# Altium PCB PCB_V2_2020-06-20_13-22-27.pcbdoc
Units mil, origin at the board's own origin, x right, y up, seen from the top; angles counter-clockwise.
Board outline 5659.89 x 5419.88 mil, 2 copper layers (Top Layer, Bottom Layer); 30 components, 49 nets, 112 pads, 43 vias.
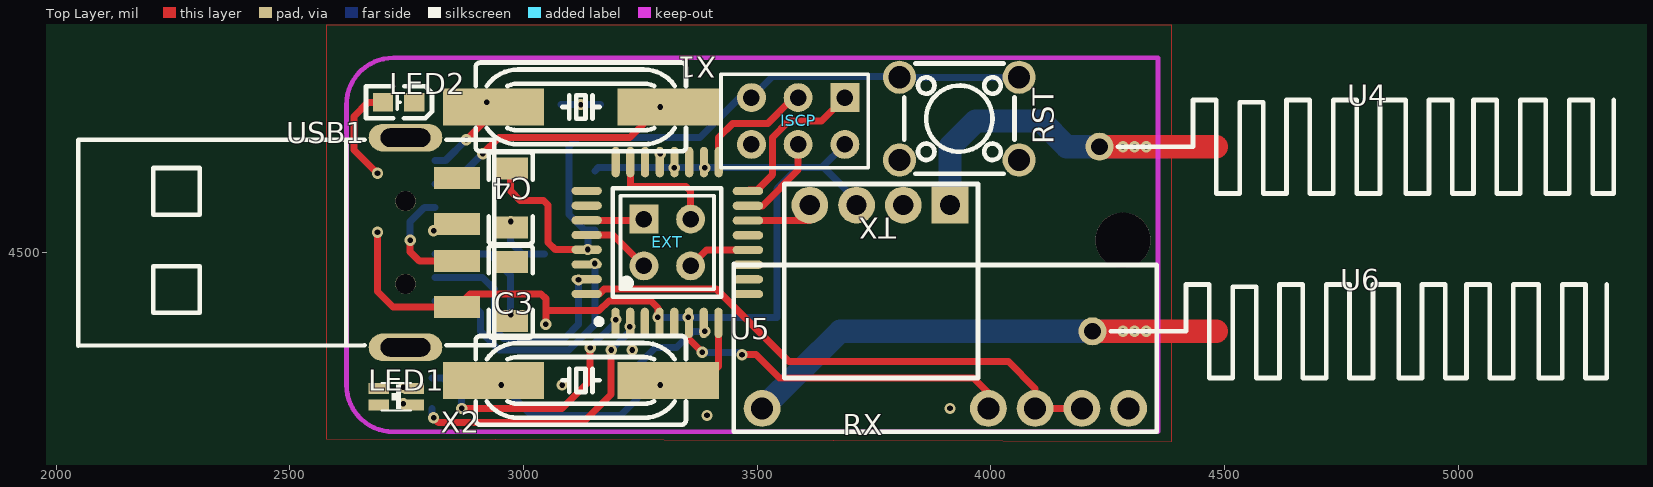
[diagram p0: Top Layer view]
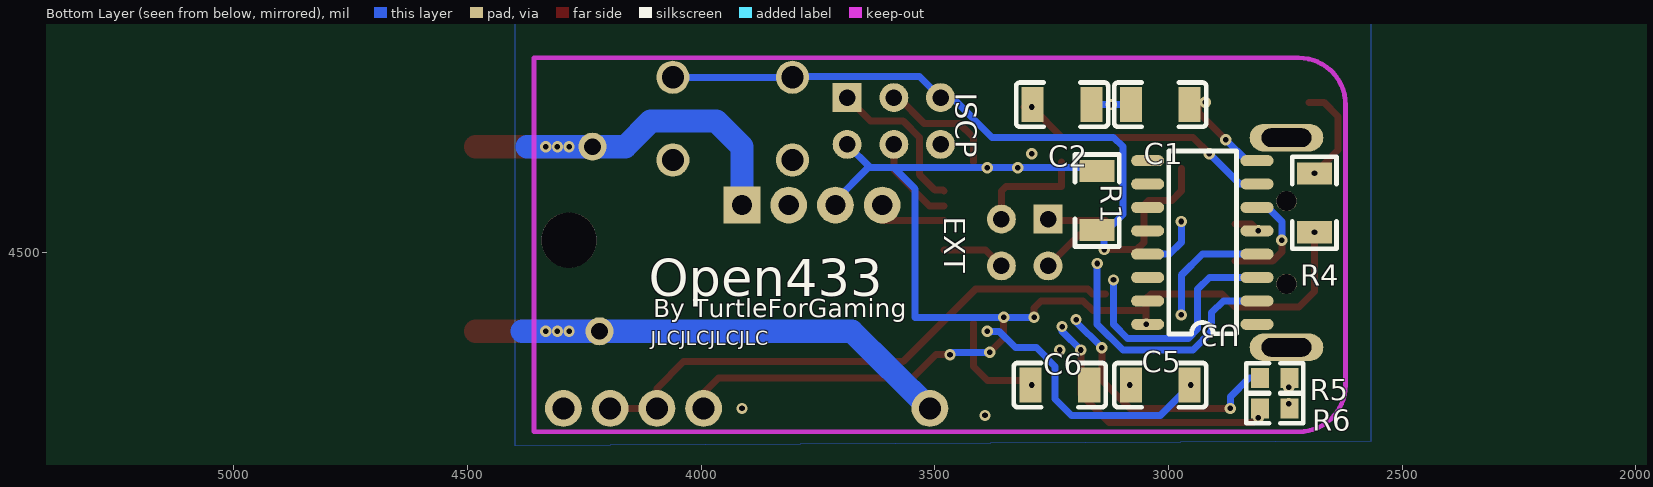
[diagram p1: Bottom Layer view, seen from below]

## Layer stack, top to bottom
Top Layer: signal copper (thickness not stored)
Dielectric: dielectric 12.6, FR-4, Dk 4.8
Bottom Layer: signal copper (thickness not stored)

## Board outline
6659.89,1000 1000,1000 1000,6419.88 6659.89,6419.88

## Components (designator, comment, footprint, x,y, rotation, side; value= is the part's Value field where it differs from the comment)
C1 "22pF" C1206#1 3017.89,4817 r180 bottom
C2 "22pF" C1206#1 3227.89,4817 r0 bottom
C3 "100nF" C1206#2 2972.89,4417 r270 top
C4 "100nF" C1206#2 2972.89,4617 r90 top
C5 "22pF" C1206#1 3017.89,4217 r180 bottom
C6 "22pF" C1206#1 3232.89,4217 r180 bottom
EXT "HDR-M-2.54_2x2" HDR-M-2.54_2X2 3307.89,4522 r0 top
ISCP "Header-Female-2.54_2x3" HDR-3X2/2.54 3587.89,4782 r180 top
LED1 "19-223/Y2R6C-A01/2T" LED-ARRAY-SMD_4P-L1.6-W1.5-TR-RD 2727.89,4192 r0 top
LED2 "19-217/GHC-YR1S2/3T" LED0603-R-RD 2732.89,4822 r180 top
R1 "10K" R1206 3152.89,4612 r90 bottom
R4 "10K" R1206 2687.89,4607 r270 bottom
R5 "2.2K" R0603 2772.89,4232 r180 bottom
R6 "2.2K" R0603 2772.89,4167 r180 bottom
RST "TS665CJ" SW-TH_4P-L6.0-W6.0-P4.50-LS6.5 3932.89,4787 r180 top
RX "DL-RXC2016BH-433M" WIRELM-TH_DL-RXC2016BH-433M 3902.89,4167 r0 top
TX "H34C-433MHZ" WIRELM-TH_H34C-433MHZ 3762.89,4602 r180 top
U3 "CH340G" SOIC-16_L9.9-W3.9-P1.27-LS6.0-BL 2927.89,4522 r270 bottom
U4 "Antenna" PCBANTENNA 4232.89,4727 r0 top
U5 "ATMEGA328P-AU" TQFP-32_L7.0-W7.0-P0.80-LS9.0-BL 3307.89,4522 r0 top
U6 "Antenna" PCBANTENNA 4217.89,4332 r0 top
USB1 "U217-04XN-XXR84" USB-A-SMD_U217-041N-4BV81 2802.89,4522 r270 top
X1 "12MHz" HC-49S_L11.4-W4.8 3122.89,4812 r180 top
X2 "16MHz" HC-49S_L11.4-W4.8 3122.89,4227 r0 top
? "" ? 2058.2,3212 r0 top
? "" ? 4390.39,5501.38 r0 top
? "" ? 4784.42,4626.99 r0 top
? "" ? 4784.42,4426.99 r0 top
? "" ? 3485.39,4885.31 r0 top
? "" ? 2212.44,4519.5 r0 top

## Footprints (in the part's own frame and the unit in brackets; to place one, negate y for a bottom-side part, rotate by r counter-clockwise, add the part's x,y. Pads: shape width x height; smd on the part's side, far side on the other; paste and mask are expansions set on the pad)
C1206#1 [mm]
  rect 1.2x1.9 smd: 1(1.6,0) 2(-1.6,0)
  silkscreen extent -2.5,-1.2 2.5,1.2
C1206#2 [mm]
  rect 1.2x1.9 smd: 1(-1.6,0) 2(1.6,0)
  silkscreen extent -2.5,-1.2 2.5,1.2
HC-49S_L11.4-W4.8 [mm]
  rect 5.5x2 smd: 1(-4.75,0) 2(4.75,0)
  silkscreen extent -5.71,-2.41 5.71,2.41
HDR-3X2/2.54 [mil]
  rect 62x62 hole 35: 1(-100,-50)
  round 62 hole 35: 2(-100,50) 3(0,-50) 4(0,50) 5(100,-50) 6(100,50)
  silkscreen extent -150,-100 165,100
HDR-M-2.54_2X2 [mil]
  rect 62x62 hole 35: 1(-50,50)
  round 62 hole 35: 2(50,50) 3(-50,-50) 4(50,-50)
  silkscreen extent -100,-100 100,100
LED0603-R-RD [mil]
  rect 43x39 smd: 1(33.5,0) 2(-33.5,0)
  silkscreen extent -72,-34 70,34
LED-ARRAY-SMD_4P-L1.6-W1.5-TR-RD [mm]
  rect 1.1x0.6 smd: 1(0.95,0.45) 2(0.95,-0.45) 3(-0.95,-0.45) 4(-0.95,0.45)
  silkscreen extent -0.8,-0.75 0.8,0.75
PCBANTENNA [mil]
  round 60 hole 36: SIG(0,0)
  silkscreen extent 39,-100 1100,100
R0603 [mm]
  rect 1x1.1 smd: 1(0.8,0) 2(-0.8,0)
  silkscreen extent -1.55,-0.81 1.55,0.8
R1206 [mm]
  rect 1.2x1.9 smd: 1(1.6,0) 2(-1.6,0)
  silkscreen extent -2.5,-1.2 2.5,1.2
SOIC-16_L9.9-W3.9-P1.27-LS6.0-BL [mil]
  oval 23.62x70.79 smd: 1(175,117) 2(125,117) 3(75,117) 4(25,117) 5(-25,117) 6(-75,117) 7(-125,117) 8(-175,117) 9(-175,-117) 10(-125,-117) 11(-75,-117) 12(-25,-117) 13(25,-117) 14(75,-117) 15(125,-117) 16(175,-117)
  silkscreen extent -196,-72 196,73
SW-TH_4P-L6.0-W6.0-P4.50-LS6.5 [mm]
  round 1.8 hole 1.2: 1(-3.25,2.25) 2(3.25,2.25) 3(-3.25,-2.25) 4(3.25,-2.25)
  silkscreen extent -3,-3 3,3
TQFP-32_L7.0-W7.0-P0.80-LS9.0-BL [mm]
  oval 0.45x1.65 smd: 1(-2.817,-4.369) 2(-2.017,-4.369) 3(-1.217,-4.369) 4(-0.417,-4.369) 5(0.381,-4.369) 6(1.181,-4.369) 7(1.981,-4.369) 8(2.781,-4.369) 17(2.791,4.369) 18(1.991,4.369) 19(1.191,4.369) 20(0.391,4.369) 21(-0.406,4.369) 22(-1.206,4.369) 23(-2.007,4.369) 24(-2.807,4.369)
  oval 1.65x0.45 smd: 9(4.381,-2.804) 10(4.381,-2.004) 11(4.381,-1.204) 12(4.381,-0.404) 13(4.381,0.394) 14(4.381,1.194) 15(4.381,1.994) 16(4.381,2.794) 25(-4.381,2.804) 26(-4.381,2.004) 27(-4.381,1.204) 28(-4.381,0.404) 29(-4.381,-0.394) 30(-4.381,-1.194) 31(-4.381,-1.994) 32(-4.381,-2.794)
  silkscreen extent -3.86,-4.45 2.94,2.95
USB-A-SMD_U217-041N-4BV81 [mm]
  rect 1.2x2.5 smd: 1(3.5,1.4) 2(1,1.4) 3(-1,1.4) 4(-3.5,1.4)
  oval 1.5x3.999 hole 1 slot 2.7 at 90 deg copper offset 0,0: 5(-5.7,-1.4)
  oval 1.5x3.999 hole 1 slot 2.7 at 90 deg: 6(5.7,-1.4)
  round 1.1 hole 1.1 unplated: ""(-2.25,-1.4) ""(2.25,-1.4)
  silkscreen extent -5.59,-19.18 5.6,3.43
WIRELM-TH_DL-RXC2016BH-433M [mm]
  round 2 hole 1.2: 1(-9.96,0) 2(2.34,0) 3(4.88,0) 4(7.42,0) 5(9.96,0)
  silkscreen extent -11.5,-1.27 11.48,7.86
WIRELM-TH_H34C-433MHZ [mm]
  rect 2x2 hole 1.1: 1(-3.81,0)
  round 2 hole 1.1: 2(-1.27,0) 3(1.27,0) 4(3.81,0)
  silkscreen extent -5.33,-1.14 5.21,9.4
? [mil]

## Free pads (board coordinates)
  round 118.11 hole 118.11 unplated: ""(4282.89,4527)

## Via types
v1: diameter 24, hole 12, Top Layer to Bottom Layer, 43 vias

## Nets (pads, with @x,y where several pads share a name; then routed paths per layer and width w, separated by ;. In a path a pad name is that pad's centre, name@x,y a point inside that pad or via, vN(x,y) a via of type N, cw(c..) or ccw(c..) an arc to the next point about the centre after c; other vN are vias at no path point)
+5V: ISCP.2 R1.1 R4.1 RX.2 TX.3 U3.16 U5.4 U5.6 U5.18 U5.20 USB1.1 | length 2999.4
  Top Layer w15: v1(2687.89,4544) 2687.89,4417 2720.69,4384.2 USB1.1 2885.79,4412 3037.89,4412 3047.89,4402 v1(3047.89,4347) ; 3047.89,4376.3 3162.19,4376.3 3182.89,4397 3272.89,4397 3287.89,4382 v1(3287.89,4362) ; v1(3352.89,4362) 3352.89,4317 v1(3382.89,4287) ; v1(3467.89,4282) 3497.89,4282 3547.89,4232 3962.89,4232 3994.99,4199.9 RX.2
  Bottom Layer w15: R1.1 3159.9,4682 v1(3322.89,4682) v1(3387.89,4682) 3642.89,4682 ; v1(3287.89,4362) v1(3352.89,4362) 3542.89,4362 3542.89,4637 3587.89,4682 3637.89,4682 ISCP.2 3642.89,4687 3642.89,4682 ; v1(3382.89,4287) 3462.89,4287 v1(3467.89,4282) ; TX.3 3712.89,4612 3642.89,4682
AO: EXT.2 U5.23 | length 245.1
  Top Layer w15: U5.23 3228.89,4642 3347.89,4642 3357.89,4632 EXT.2
C1_1: C1.1 U3.8 X1.2 | length 179.7
  Top Layer w15: v1(2877.89,4742) 2935.88,4799.99 X1.2
  Bottom Layer w15: U3.8 2832.89,4697 v1(2877.89,4742)
  other v1: 2921.39,4822
C2_1: C2.1 U3.7 X1.1 | length 567.4
  Top Layer w15: v1(2912.89,4712) 2947.89,4747 3227.89,4747 v1(3292.89,4812) X1.1
  Bottom Layer w15: U3.7 2847.89,4647 v1(2912.89,4712)
C3_2: C3.2 U3.4 | length 265.6
  Bottom Layer w15: U3.4 2927.89,4497 2972.89,4452 v1(2972.89,4367)
D+: U3.5 USB1.3 | length 56.1
  Top Layer w15: v1(2807.89,4547) 2822.25,4561.36 USB1.3
D-: U3.6 USB1.2 | length 238.6
  Top Layer w15: v1(2757.89,4527) 2757.89,4502 2777.27,4482.62 USB1.2
  Bottom Layer w15: v1(2757.89,4527) 2757.89,4567 2787.89,4597 U3.6
GND: C1.2 C2.2 C3.1 C5.2 C6.1 ISCP.6 LED1.3 LED1.4 LED2.2 RST.1 RST.2 RX.5 TX.2 U3.1 U5.3 U5.5 U5.21 USB1.4 USB1.5 USB1.6 | length 84
  Bottom Layer w15: C1.2 v1(3122.54,4817) C2.2
  other v1: 3392.89,4152 3912.89,4167 3082.89,4217 3232.89,4292 3292.89,4712
LED1_1: LED1.1 R5.1
  other v1: 2742.89,4212
LED1_2: LED1.2 R6.1
  other v1: 2742.89,4177
LED2_1: LED2.1 R4.2 | length 216.6
  Top Layer w15: v1(2687.89,4670) 2637.89,4720 2637.89,4792 2667.89,4822 LED2.1
MISO: ISCP.1 U5.16 | length 337.2
  Top Layer w15: U5.16 3482.89,4634.5 3500.39,4634.5 3532.89,4667 3532.89,4747 3567.89,4782 3637.89,4782 ISCP.1
MOSI: ISCP.4 U5.15 | length 194.2
  Top Layer w15: U5.15 3511.39,4600.5 3587.89,4677 ISCP.4
PBO: EXT.4 U5.12 | length 136.6
  Top Layer w15: EXT.4 3391.99,4506.1 U5.12
RESET: C4.2 ISCP.5 R1.2 RST.3 RST.4 U5.29 | length 1604.6
  Top Layer w15: C4.2 2972.89,4632 2992.89,4612 3042.89,4612 3052.89,4602 3052.89,4522 3068.39,4506.5 U5.29
  Bottom Layer w15: v1(3137.89,4507) 3137.89,4547 3139.89,4549 R1.2 3130.89,4549 3097.89,4582 3097.89,4727 3117.89,4747 3289.68,4747 3377.89,4747 3462.89,4832 ISCP.5 3532.89,4877 3803.52,4877 RST.4 ; RST.4 RST.3
RF_RX: RX.3 RX.4 U5.32 | length 1194.5
  Top Layer w15: U5.32 3162.89,4412 3172.89,4422 3412.89,4422 3567.89,4267 4037.89,4267 4094.99,4209.9 RX.3 RX.4
RF_TX: TX.4 U5.14 | length 165.5
  Top Layer w15: U5.14 3612.89,4569 TX.4
RX: U3.3 U5.31 | length 518.1
  Bottom Layer w15: U3.3 2912.89,4447 2937.89,4422 2937.89,4337 2957.89,4317 3087.89,4317 3117.89,4347 v1(3117.89,4442)
RX_EN: R6.2 U5.2 | length 592
  Top Layer w15: v1(2807.89,4147) 2817.89,4137 3127.89,4137 3187.89,4197 v1(3187.89,4292)
  Bottom Layer w15: R6.2 2804.38,4150.51 v1(2807.89,4147) ; v1(3187.89,4292) 3227.89,4332 v1(3227.89,4342)
S$1070: 
S$1075: 
S$7115: 
S$12268: 
S$12270: 
SCK: ISCP.3 U5.17 | length 258.2
  Top Layer w15: U5.17 3417.79,4746.9 3447.89,4777 3522.89,4777 3577.89,4832 ISCP.3
SCL: EXT.3 U5.28 | length 149.8
  Top Layer w15: U5.28 3191.99,4537.9 EXT.3
SDA: EXT.1 U5.27 | length 125.1
  Top Layer w15: U5.27 3257.89,4569.4 EXT.1
TX: U3.2 U5.30 | length 561.7
  Bottom Layer w15: U3.2 2882.89,4397 2907.89,4372 2907.89,4332 2947.89,4292 3097.89,4292 3152.89,4347 v1(3152.89,4477)
TX_EN: R5.2 U5.1 | length 557.7
  Top Layer w15: v1(2867.89,4167) 3082.89,4167 3142.89,4227 v1(3142.89,4297)
  Bottom Layer w15: R5.2 2827.89,4232 2867.89,4192 v1(2867.89,4167) ; v1(3142.89,4297) 3197.89,4352 v1(3197.89,4357)
U1_1: TX.1 U4.SIG | length 1055.6
  Top Layer w50: U4.SIG 4482.89,4727 v1(4307.89,4727)
  Bottom Layer w50: TX.1 3912.89,4727 3967.89,4782 4107.89,4782 4162.89,4727 4372.89,4727
  other v1: 4282.89,4727 4332.89,4727
U2_1: RX.1 U6.SIG | length 1204.8
  Top Layer w50: U6.SIG 4322.89,4332 v1(4332.89,4332) 4482.89,4332
  Bottom Layer w50: RX.1 3677.89,4332 U6.SIG 4382.89,4332
  other v1: 4282.89,4332 4307.89,4332
U3_9: U3.9
U3_10: U3.10
U3_11: U3.11
U3_12: U3.12
U3_13: C4.1 U3.13 | length 127.4
  Bottom Layer w15: v1(2972.89,4567) 2972.89,4522 2997.89,4497 U3.13
U3_14: U3.14
U3_15: U3.15
U5_7: C5.1 U5.7 X2.1 | length 577.5
  Bottom Layer w15: v1(2952.89,4217) 3017.89,4152 3207.89,4152 3242.89,4187 3242.89,4257 3282.89,4297 3327.89,4297 3362.89,4332 v1(3387.89,4332)
U5_8: C6.2 U5.8 X2.2 | length 213.2
  Top Layer w15: X2.2 3387.89,4227 3417.39,4256.5 U5.8
  other v1: 3292.89,4217
U5_9: U5.9
U5_10: U5.10
U5_11: U5.11
U5_13: U5.13
U5_19: U5.19
U5_22: U5.22
U5_24: U5.24
U5_25: U5.25
U5_26: U5.26
pads on no net: USB1.

## Polygon pours and split planes (outlines as drawn)
GND on Bottom Layer (solid): 4397.89,4997 2567.89,4992 2567.89,4097 4397.89,4087
GND on Top Layer (solid): 4387.89,4987 2577.89,4987 2577.89,4102 4387.89,4097

## Keep-outs
Keep-Out Layer:
  lines w10 net S$1070: 2621.39,4217 ccw(c2721.39,4217) 2721.39,4117 ; 2621.39,4817 cw(c2721.39,4817) 2721.39,4917

## Silkscreen, mask and mechanical layers (free items; w line width, h text height)
Bottom Overlay:
  text "Open433" at 4112.89,4407 h80
  text "By TurtleForGaming" at 4102.89,4362.31 h39.37
  text "JLCJLCJLCJLC" at 4107.89,4302.24 h29.53
Top Solder:
  region net S$12268: 4362.89,4797 4232.89,4797 4212.89,4797 4187.89,4772 4187.89,4767 4177.89,4757 4177.89,4747 4172.89,4742 4172.89,4722 4172.89,4697 4177.89,4692 4192.89,4677 4202.89,4667 4207.89,4667 4212.89,4662 4217.89,4662 4222.89,4657 4232.89,4657 4237.89,4652 4312.89,4652 4317.89,4657 4362.89,4657 4362.89,4677
  region net S$12268: 4350.31,4402 4220.31,4402 4200.31,4402 4175.31,4377 4175.31,4372 4165.31,4362 4165.31,4352 4160.31,4347 4160.31,4327 4160.31,4302 4165.31,4297 4180.31,4282 4190.31,4272 4195.31,4272 4200.31,4267 4205.31,4267 4210.31,4262 4220.31,4262 4225.31,4257 4300.31,4257 4305.31,4262 4350.31,4262 4350.31,4282
  lines w15: 4222.89,4262 cw(c4227.89,4332) 4222.89,4402 ; 4235.48,4657 cw(c4240.47,4727) 4235.48,4797
  lines w15 net S$12268: 4222.89,4402 4345.31,4402 ; 4235.48,4797 4357.89,4797
  lines w15 net S$12270: 4222.89,4262 4345.31,4262 ; 4235.48,4657 4357.89,4657
Bottom Solder:
  region net S$12268: 4355.31,4402 4225.31,4402 4205.31,4402 4180.31,4377 4180.31,4372 4170.31,4362 4170.31,4352 4165.31,4347 4165.31,4327 4165.31,4302 4170.31,4297 4185.31,4282 4195.31,4272 4200.31,4272 4205.31,4267 4210.31,4267 4215.31,4262 4225.31,4262 4230.31,4257 4305.31,4257 4310.31,4262 4355.31,4262 4355.31,4282
  region net S$12268: 4365.31,4797 4235.31,4797 4215.31,4797 4190.31,4772 4190.31,4767 4180.31,4757 4180.31,4747 4175.31,4742 4175.31,4722 4175.31,4697 4180.31,4692 4195.31,4677 4205.31,4667 4210.31,4667 4215.31,4662 4220.31,4662 4225.31,4657 4235.31,4657 4240.31,4652 4315.31,4652 4320.31,4657 4365.31,4657 4365.31,4677
  lines w15: 4227.89,4262 cw(c4232.89,4332) 4227.89,4402 ; 4237.89,4657 cw(c4242.89,4727) 4237.89,4797
  lines w15 net S$12268: 4227.89,4402 4350.31,4402 ; 4237.89,4797 4360.31,4797
  lines w15 net S$12270: 4227.89,4262 4350.31,4262 ; 4237.89,4657 4360.31,4657
Document:
  lines w15 net S$7115: 2262.89,4527 4577.89,4527